# EAGLE board RasPi-BplusHAT (EAGLE 8.7.0)
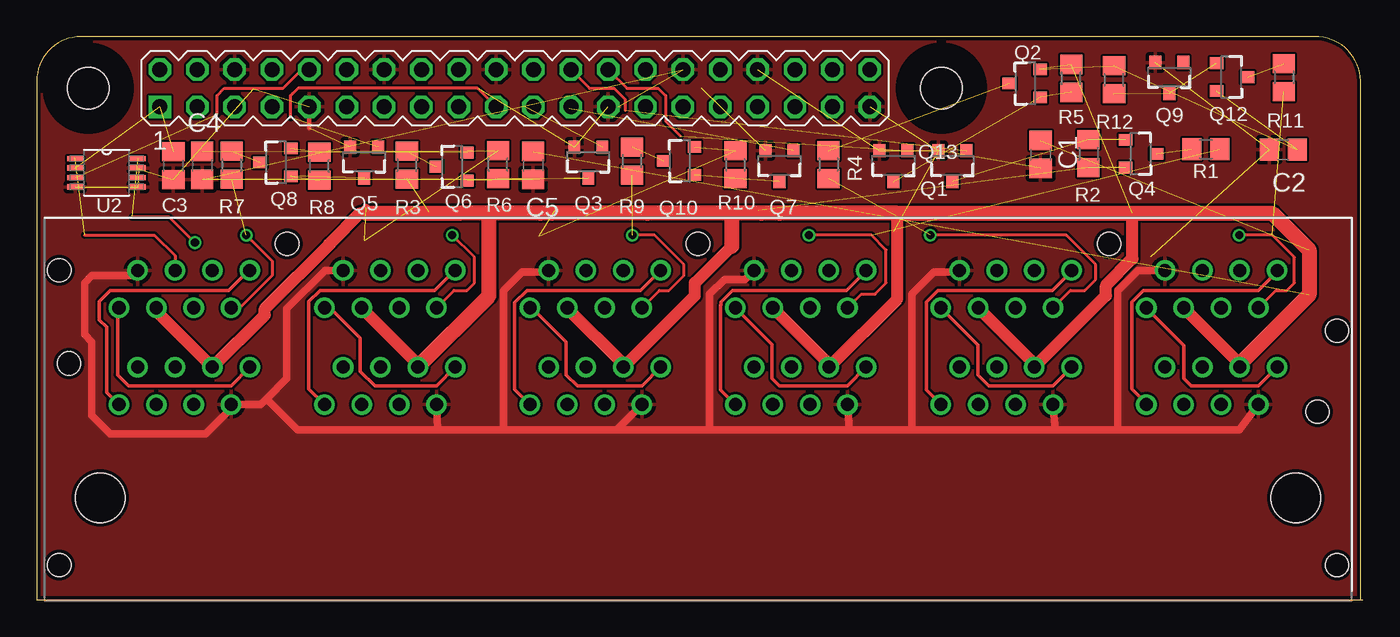
[diagram p0: board, top side]
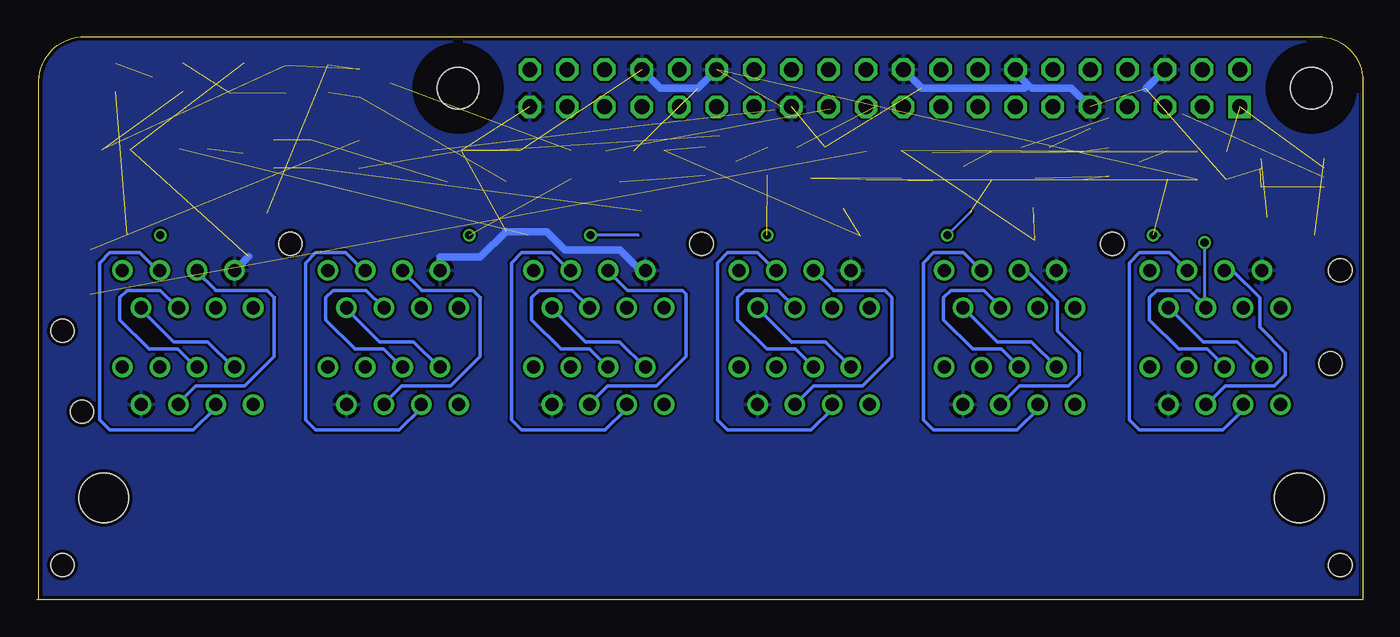
[diagram p1: board, bottom side, seen from below]

Size 90.15 x 38.3 mm. Coordinates in mm from the lower left corner, seen from the top.
Outline: 90,0 0,0 0,35.3 arc-90 3,38.3 86.89,38.3 arc-90 90,35.3 90,0
Outline: 90,0 90.15,0
Copper layers (1*16): Top 0.035mm / dielectric 1.5mm / Bottom 0.035mm
Design rules "ITEADstudio_DRC": minimum track width 6mil, minimum drill 12mil, track to track 6mil, track to pad 6mil, pad to pad 6mil, via to via 6mil, smd to smd 0mil, copper to edge 10mil, drill to drill 10mil, minimum pad ring 10mil, minimum via ring 6mil, stop-mask expansion 2mil, vias tented up to drill 100mil, thermal gap 10mil
Holes 2.8 mm at 3.5,34.8 61.5,34.8
tRestrict: area 1.9,33.3 to 5,36.4; area 60,33.3 to 63,36.4
bRestrict: area 1.9,33.3 to 5,36.4; area 60,33.3 to 63,36.4

## Footprints (pad centres in the part's own frame; a part is rotated, then mirrored left to right if it is on the bottom)
C0805 = smd 1.3 x 1.5: 1 -0.95,0; 2 0.95,0
PIN_20X2 = drill 1.016 square: 1 -24.13,-1.27 | drill 1.016 octagon: 2 -24.13,1.27; 3 -21.59,-1.27; 4 -21.59,1.27; 5 -19.05,-1.27; 6 -19.05,1.27; 7 -16.51,-1.27; 8 -16.51,1.27; 9 -13.97,-1.27; 10 -13.97,1.27; 11 -11.43,-1.27; 12 -11.43,1.27; 13 -8.89,-1.27; 14 -8.89,1.27; 15 -6.35,-1.27; 16 -6.35,1.27; 17 -3.81,-1.27; 18 -3.81,1.27; 19 -1.27,-1.27; 20 -1.27,1.27; 21 1.27,-1.27; 22 1.27,1.27; 23 3.81,-1.27; 24 3.81,1.27; 25 6.35,-1.27; 26 6.35,1.27; 27 8.89,-1.27; 28 8.89,1.27; 29 11.43,-1.27; 30 11.43,1.27; 31 13.97,-1.27; 32 13.97,1.27; 33 16.51,-1.27; 34 16.51,1.27; 35 19.05,-1.27; 36 19.05,1.27; 37 21.59,-1.27; 38 21.59,1.27; 39 24.13,-1.27; 40 24.13,1.27
SOT23-3 = smd 0.8 x 0.9: 1 -0.95,-1; 2 0.95,-1; 3 0,1.1
R0805 = smd 1.3 x 1.5: 1 -0.95,0; 2 0.95,0
SOP65P490X110-8N = smd 1.067 x 0.356: 1 -2.134,0.965; 2 -2.134,0.33; 3 -2.134,-0.33; 4 -2.134,-0.965; 5 2.134,-0.965; 6 2.134,-0.33; 7 2.134,0.33; 8 2.134,0.965
STEWARTSS73100 = drill 0.889: P$1 1.27,0; P$2 2.54,2.54; P$3 3.81,0; P$4 5.08,2.54; P$5 6.35,0; P$6 7.62,2.54; P$7 8.89,0; P$8 10.16,2.54; P$9 10.16,9.119; P$10 8.89,6.579; P$11 7.62,9.119; P$12 6.35,6.579; P$13 5.08,9.119; P$14 3.81,6.579; P$15 2.54,9.119; P$16 1.27,6.579; P$17 15.24,0; P$18 16.51,2.54; P$19 17.78,0; P$20 19.05,2.54; P$21 20.32,0; P$22 21.59,2.54; P$23 22.86,0; P$24 24.13,2.54; P$25 24.13,9.119; P$26 22.86,6.579; P$27 21.59,9.119; P$28 20.32,6.579; P$29 19.05,9.119; P$30 17.78,6.579; P$31 16.51,9.119; P$32 15.24,6.579; P$33 29.21,0; P$34 30.48,2.54; P$35 31.75,0; P$36 33.02,2.54; P$37 34.29,0; P$38 35.56,2.54; P$39 36.83,0; P$40 38.1,2.54; P$41 38.1,9.119; P$42 36.83,6.579; P$43 35.56,9.119; P$44 34.29,6.579; P$45 33.02,9.119; P$46 31.75,6.579; P$47 30.48,9.119; P$48 29.21,6.579; P$49 43.18,0; P$50 44.45,2.54; P$51 45.72,0; P$52 46.99,2.54; P$53 48.26,0; P$54 49.53,2.54; P$55 50.8,0; P$56 52.07,2.54; P$57 52.07,9.119; P$58 50.8,6.579; P$59 49.53,9.119; P$60 48.26,6.579; P$61 46.99,9.119; P$62 45.72,6.579; P$63 44.45,9.119; P$64 43.18,6.579; P$65 57.15,0; P$66 58.42,2.54; P$67 59.69,0; P$68 60.96,2.54; P$69 62.23,0; P$70 63.5,2.54; P$71 64.77,0; P$72 66.04,2.54; P$73 66.04,9.119; P$74 64.77,6.579; P$75 63.5,9.119; P$76 62.23,6.579; P$77 60.96,9.119; P$78 59.69,6.579; P$79 58.42,9.119; P$80 57.15,6.579; P$81 71.12,0; P$82 72.39,2.54; P$83 73.66,0; P$84 74.93,2.54; P$85 76.2,0; P$86 77.47,2.54; P$87 78.74,0; P$88 80.01,2.54; P$89 80.01,9.119; P$90 78.74,6.579; P$91 77.47,9.119; P$92 76.2,6.579; P$93 74.93,9.119; P$94 73.66,6.579; P$95 72.39,9.119; P$96 71.12,6.579 | hole 3.353: 0,-6.35; 81.28,-6.35 | hole 1.575: -2.134,2.794; -2.794,9.119; -2.794,-10.922; 84.074,-10.922; 82.753,-0.483; 84.074,5.029; 12.7,10.922; 40.64,10.922; 68.58,10.922

## Placement (x,y rotation side)
C1  [C0805]  68.25,30.3 270 top
C2  [C0805]  84.75,30.62 180 top
C3  [C0805]  9.29,29.54 270 top
C4  [C0805]  11.25,29.55 270 top
C5  [C0805]  33.75,29.55 270 top
K1  PIN20X2  [PIN_20X2]  32.5,34.8 0 top
Q1  220mA/50V/3.5Ω  [SOT23-3]  62.25,29.55 180 top
Q2  1.1A/60V/600mΩ  [SOT23-3]  67.21,35.13 90 top
Q3  220mA/50V/3.5Ω  [SOT23-3]  37.5,29.8 180 top
Q4  1.1A/60V/600mΩ  [SOT23-3]  75.03,30.34 270 top
Q5  220mA/50V/3.5Ω  [SOT23-3]  22.25,29.8 180 top
Q6  1.1A/60V/600mΩ  [SOT23-3]  28.26,29.47 90 top
Q7  220mA/50V/3.5Ω  [SOT23-3]  50.5,29.55 180 top
Q8  1.1A/60V/600mΩ  [SOT23-3]  16.27,29.77 90 top
Q9  220mA/50V/3.5Ω  [SOT23-3]  77,35.55 180 top
Q10  1.1A/60V/600mΩ  [SOT23-3]  43.72,29.86 90 top
Q12  1.1A/60V/600mΩ  [SOT23-3]  81.21,35.56 270 top
Q13  220mA/50V/3.5Ω  [SOT23-3]  58.25,29.55 180 top
R1  100  [R0805]  79.48,30.66 0 top
R2  1k  [R0805]  71.51,30.34 270 top
R3  100  [R0805]  25.16,29.56 270 top
R4  100  [R0805]  53.84,29.61 270 top
R5  1k  [R0805]  70.33,35.47 90 top
R6  1k  [R0805]  31.36,29.61 90 top
R7  100  [R0805]  13.25,29.56 270 top
R8  1k  [R0805]  19.21,29.51 90 top
R9  100  [R0805]  40.46,29.84 270 top
R10  1k  [R0805]  47.51,29.6 90 top
R11  100  [R0805]  84.79,35.53 270 top
R12  1k  [R0805]  73.25,35.37 90 top
U2  MAX481CUA+  [SOP65P490X110-8N]  4.75,29.05 0 top
U$1  STEWARTSS73100  [STEWARTSS73100]  4.32,13.29 0 top

## Library data of the parts
C1-C5 = rcl; SPICEPREFIX: C
K1 = FLYFISH
Q1 Q3 Q5 Q7 Q9 Q13 = SparkFun-DiscreteSemi; PROD_ID: TRANS-00830
Q2 Q4 Q6 Q8 Q10 Q12 = SparkFun-DiscreteSemi; PROD_ID: TRANS-08285
R1-R12 = resistor
U2 = MAX481CUA_; AVAILABILITY: Bad; DESCRIPTION: IC TXRX RS485/RS422 5V 8-UMAX; MF: Maxim Integrated; MP: MAX481CUA+; PACKAGE: MSOP-8 Maxim Integrated; PRICE: 1.77 USD
U$1 = Stewart_Connector_SS73100-046F

## Nets
485+: U2.8 U$1.P$4 U$1.P$12
485-: U2.1 U$1.P$5 U$1.P$13
+3V3: C3.1 K1.1 U2.2
+12V: C1.1 C2.1 C4.1 C5.1 Q2.2 Q4.2 Q6.2 Q8.2 Q10.2 Q12.2 R2.2 R5.2 R6.2 R8.2 R10.2 R12.2 U$1.P$6 U$1.P$14 U$1.P$22 U$1.P$30 U$1.P$38 U$1.P$46 U$1.P$54 U$1.P$62 U$1.P$70 U$1.P$78 U$1.P$86 U$1.P$94
GND: C1.2 C2.2 C3.2 C4.2 C5.2 K1.6 K1.9 K1.14 K1.20 K1.25 K1.30 K1.34 K1.39 Q1.2 Q3.2 Q5.2 Q7.2 Q9.2 Q13.2 U2.4 U2.5 U2.7 U$1.P$7 U$1.P$15 U$1.P$23 U$1.P$31 U$1.P$39 U$1.P$47 U$1.P$55 U$1.P$63 U$1.P$71 U$1.P$79 U$1.P$87 U$1.P$95
GPIO02: K1.3
GPIO6: Q9.1
GPIO06: K1.31
GPIO07: K1.26 Q13.1
GPIO08: K1.24 Q1.1
GPIO09: K1.21 Q3.1
GPIO10: K1.19 Q5.1
GPIO11: K1.23 Q7.1
GPIO12: K1.32
GPIO21: K1.40
N$1: Q1.3 Q4.1 R2.1
N$2: Q4.3 R1.1
N$3: Q3.3 Q6.1 R6.1
N$4: Q2.1 Q13.3 R5.1
N$5: Q2.3 R4.1
N$6: Q6.3 R3.1
N$7: Q5.3 Q8.1 R8.1
N$8: Q8.3 R7.1
N$9: Q7.3 Q10.1 R10.1
N$10: Q10.3 R9.1
N$11: Q9.3 Q12.1 R12.1
N$12: Q12.3 R11.1
N$13: U$1.P$1 U$1.P$9
N$15: U$1.P$3 U$1.P$11
N$17: U2.6
N$21: U$1.P$17 U$1.P$25
N$23: U$1.P$19 U$1.P$27
N$24: U$1.P$20 U$1.P$28
N$25: U$1.P$21 U$1.P$29
N$29: U$1.P$33 U$1.P$41
N$31: U$1.P$35 U$1.P$43
N$32: U$1.P$36 U$1.P$44
N$33: U$1.P$37 U$1.P$45
N$36: U$1.P$8 U$1.P$16
N$37: U$1.P$49 U$1.P$57
N$39: U$1.P$51 U$1.P$59
N$40: U$1.P$52 U$1.P$60
N$41: U$1.P$53 U$1.P$61
N$45: U$1.P$65 U$1.P$73
N$47: U$1.P$67 U$1.P$75
N$48: U$1.P$68 U$1.P$76
N$49: U$1.P$69 U$1.P$77
N$53: U$1.P$81 U$1.P$89
N$55: U$1.P$83 U$1.P$91
N$56: U$1.P$84 U$1.P$92
N$57: U$1.P$85 U$1.P$93
N$61: U$1.P$24 U$1.P$32
N$62: U$1.P$40 U$1.P$48
N$63: U$1.P$56 U$1.P$64
N$64: U$1.P$72 U$1.P$80
N$65: U$1.P$88 U$1.P$96
RXI: K1.10 U2.3
ZONE1: R7.2 U$1.P$2 U$1.P$10
ZONE2: R3.2 U$1.P$18 U$1.P$26
ZONE3: R9.2 U$1.P$34 U$1.P$42
ZONE4: R1.2 U$1.P$50 U$1.P$58
ZONE5: R4.2 U$1.P$66 U$1.P$74
ZONE6: R11.2 U$1.P$82 U$1.P$90

## Tracks (layer width: path | path; a pad name or v marks a point on that pad's centre or on a via)
485+  (via drill 0.55)  (1 unrouted)
  Top 0.203: v10.75,24.3 9,26.05 6.5,26.05
  Bottom 0.203: U$1.P$12 10.75,19.95 v10.75,24.3
  Bottom 0.254: 10.61,19.87 10.61,19.91 11.75,21.05 14,21.05 14.5,20.55 14.5,19.04 12.51,17.05 10.56,17.05 9.34,15.83
  Bottom 0.305: U$1.P$4 9.34,15.83 | U$1.P$12 10.61,19.87
485-  (2 unrouted)
  Top 0.203: 3.25,24.8 8,24.8 9.4,23.41 U$1.P$13
  Bottom 0.152: 10.61,13.46 10.61,13.29
  Bottom 0.254: 10.61,13.29 9.34,14.55 6,14.55 5.25,15.3 5.25,16.8 7,18.55 7,20.55 8.86,22.41 U$1.P$13
  Bottom 0.305: U$1.P$5 10.61,13.29
+3V3  (2 unrouted)
+12V  (18 unrouted)
  Top 0.305: 82.71,26.34 82.75,26.3 | 49.08,26.47 49.25,26.3 | 28.67,26.39 28.75,26.3 | 35.3,26.61 35,26.3 | 34.24,26.32 34.25,26.3 | 50.33,26.47 50.5,26.3
  Top 0.508: 41.46,26.34 41.5,26.3 | 19.75,24.3 20,24.3 | 22.39,26.7 22,26.3
  Top 0.813: U$1.P$14 8.13,19.64 U$1.P$6 15.5,19.39 15.5,19.8 20,24.3 22,26.3 22.41,26.3 | U$1.P$30 25.91,16.06 U$1.P$22 | U$1.P$46 39.88,16.06 U$1.P$38 44.75,20.7 44.75,21.55 47.25,24.05 | U$1.P$62 53.85,16.06 U$1.P$54 58.5,20.48 58.5,26.3 | U$1.P$78 67.82,16.06 U$1.P$70 72.69,20.7 72.69,21.39 74.5,23.2 74.5,26.3 | U$1.P$94 81.79,16.06 U$1.P$86
  Top 1.016: U$1.P$22 30.75,20.67 30.75,26.3 | 47.25,26.3 49.25,26.3 50.5,26.3 58.5,26.3 74.5,26.3 82.75,26.3 84,26.3 86.5,23.8 86.5,20.77 81.79,16.06 | 47.25,26.3 41.5,26.3 35,26.3 34.25,26.3 30.75,26.3 | 30.75,26.3 28.75,26.3 22.41,26.3 | 47.25,24.05 47.25,26.3
GND  (20 unrouted)
  Top 0.305: K1.9 18.53,32.07 | K1.25 39.52,33.53
  Top 0.508: U$1.P$15 6.5,22.05 3.75,22.05 3.25,21.55 3.25,18.05 3.75,17.55 3.75,12.55 5,11.3 11.5,11.3 13.21,13.01 U$1.P$7 15.24,13.29 15.62,13.68 | 15.62,13.68 17,15.05 17,19.8 19.61,22.41 U$1.P$31 | 15.62,13.68 17.75,11.55 27.25,11.55 | U$1.P$39 39.41,11.55 | 39.41,11.55 31.75,11.55 | 31.75,11.55 27.25,11.55 | U$1.P$23 27.25,11.55 | U$1.P$55 55.25,11.55 | 55.25,11.55 45.75,11.55 | 45.75,11.55 39.41,11.55 | U$1.P$87 81.75,11.55 73.5,11.55 | 73.5,11.55 69.25,11.55 | 69.25,11.55 59.5,11.55 | 59.5,11.55 55.25,11.55 | U$1.P$71 69.25,11.55 | U$1.P$47 34.69,22.3 33,22.3 31.75,21.05 31.75,11.55 | U$1.P$63 48.16,21.8 46.75,21.8 45.75,20.8 45.75,11.55 | U$1.P$79 62.63,22.3 61,22.3 59.5,20.8 59.5,11.55 | U$1.P$95 74.86,22.41 73.5,21.05 73.5,11.55
  Bottom 0.508: K1.6 14.75,34.77 | K1.34 47.75,34.8 45.2,34.8 K1.30 | 75.75,23.37 U$1.P$95 | U$1.P$79 62.74,23.3 60,23.3 58.25,25.05 55.5,25.05 54.25,23.8 50.5,23.8 49.1,22.41 U$1.P$63 | K1.9 19.8,34.8 22.5,34.8 22.75,35.05 | 22.75,35.05 23.61,35.91 K1.14 | K1.20 30,34.84 30,34.8 23,34.8 22.75,35.05
  pour Bottom: 0,0 90,0 90,35.3 arc90 86.89,38.3 3,38.3 arc90 0,34.8
  pour Top: 0,0.06 90,0 90,35.3 arc90 86.89,38.3 3,38.3 arc90 0,34.29
GPIO07  (1 unrouted)
  Top 0.203: K1.26 40.12,34.8 42.25,34.8 42.75,34.3 42.75,32.55 43.75,31.55
GPIO08  (1 unrouted)
  Top 0.203: 40,33.3 40,34.05 39.25,34.8 37.58,34.8 K1.24
GPIO09  (1 unrouted)
  Top 0.203: K1.21 33.18,33.53
GPIO10  (1 unrouted)
  Top 0.203: K1.19 29.96,34.8 17.76,34.8 17.4,34.44 17.38,34.44 17.25,34.3 17.25,32.8
GPIO11  (1 unrouted)
  Top 0.203: 36.2,33.42 K1.23
N$1  (2 unrouted)
N$2  (1 unrouted)
N$3  (2 unrouted)
N$4  (2 unrouted)
N$5  (1 unrouted)
N$6  (1 unrouted)
N$7  (2 unrouted)
N$8  (1 unrouted)
N$9  (2 unrouted)
N$10  (1 unrouted)
N$11  (2 unrouted)
N$12  (1 unrouted)
N$13
  Top 0.254: 14.42,22.41 13.06,21.05 5,21.05 4.25,20.3 4.25,19.05 4.75,18.55 4.75,14.13 U$1.P$1
  Top 0.305: U$1.P$9 14.42,22.41
N$15
  Bottom 0.152: U$1.P$11 11.88,22.41
  Bottom 0.254: U$1.P$11 13.15,23.62 15.18,23.62 15.88,22.92 15.88,12.23 15.2,11.55 9.5,11.55 8.07,12.99 8.07,13.29 U$1.P$3
  Bottom 0.305: U$1.P$11
N$21
  Top 0.254: 28.42,22.41 27.06,21.05 19.25,21.05 18.5,20.3 18.5,14.35 U$1.P$17
  Top 0.305: U$1.P$25 28.42,22.41
N$23
  Bottom 0.152: 25.93,22.41 25.88,22.41
  Bottom 0.254: 22.07,13.29 22.07,12.99 23.5,11.55 29.2,11.55 29.88,12.23 29.88,22.92 29.18,23.62 27.15,23.62 25.93,22.41 U$1.P$27
  Bottom 0.305: U$1.P$19 22.07,13.29
N$24
  Bottom 0.254: 24.61,19.87 24.61,19.91 25.75,21.05 28,21.05 28.5,20.55 28.5,19.04 26.51,17.05 24.56,17.05 23.34,15.83
  Bottom 0.305: U$1.P$20 23.34,15.83 | U$1.P$28 24.61,19.87
N$25
  Bottom 0.152: 24.61,13.46 24.61,13.29
  Bottom 0.254: 24.61,13.29 23.34,14.55 20,14.55 19.25,15.3 19.25,16.8 20.75,18.3 20.75,20.3 22.86,22.41 23.34,22.41
  Bottom 0.305: U$1.P$21 24.61,13.29 | U$1.P$29 23.34,22.41
N$29
  Top 0.254: U$1.P$41 41.06,21.05 33.33,21.05 32.5,20.22 32.5,14.32 U$1.P$33
N$31
  Bottom 0.152: 39.94,22.41 U$1.P$43
  Bottom 0.254: 39.94,22.41 41.15,23.62 43.18,23.62 43.88,22.92 43.88,12.23 43.2,11.55 37.5,11.55 36.07,12.99 U$1.P$35
N$32
  Bottom 0.254: U$1.P$44 38.61,19.91 39.75,21.05 42,21.05 42.5,20.55 42.5,19.04 40.51,17.05 38.56,17.05 U$1.P$36
N$33
  Bottom 0.152: 38.61,13.46 U$1.P$37
  Bottom 0.254: U$1.P$37 37.34,14.55 34,14.55 32,16.55 32,20.55 | 32,20.55 31.99,20.56 | U$1.P$45 36,21.07 | 36,21.07 36,21.05 | 32,20.55 32.5,21.05 35.98,21.05 36,21.07
N$36
  Top 0.254: U$1.P$16 5.5,19.78 5.5,15.3 6.25,14.55 13.2,14.55 U$1.P$8
N$37
  Top 0.254: 56.42,22.41 55.06,21.05 47.3,21.05 46.52,20.27 46.52,20.07 46.5,20.05 46.5,14.29 U$1.P$49
  Top 0.305: U$1.P$57 56.42,22.41
N$39
  Bottom 0.152: 53.94,22.41 53.88,22.41
  Bottom 0.254: 53.94,22.41 55.15,23.62 57.18,23.62 57.88,22.92 57.88,12.23 57.2,11.55 51.5,11.55 50.07,12.99 50.07,13.29
  Bottom 0.305: U$1.P$59 53.94,22.41 | U$1.P$51 50.07,13.29
N$40
  Bottom 0.254: 51.34,15.83 52.56,17.05 54.51,17.05 56.5,19.04 56.5,20.55 56,21.05 53.75,21.05 52.61,19.91 52.61,19.87 U$1.P$60
  Bottom 0.305: U$1.P$52 51.34,15.83
N$41
  Bottom 0.152: 52.61,13.46 52.61,13.29
  Bottom 0.254: 52.61,13.29 51.34,14.55 48,14.55 46,16.55 46,20.8 46.25,21.05 49.98,21.05 51.31,22.38 | 51.31,22.38 51.34,22.41 | U$1.P$61 51.31,22.38
  Bottom 0.305: U$1.P$53 52.61,13.29
N$45
  Top 0.254: 70.42,22.41 69.06,21.05 61.27,21.05 60.49,20.27 60.49,14.27 U$1.P$65
  Top 0.305: U$1.P$73 70.42,22.41
N$47
  Bottom 0.152: 67.88,22.41 67.94,22.41
  Bottom 0.254: 67.94,22.41 69.15,23.62 71.18,23.62 71.88,22.92 71.88,12.23 71.2,11.55 65.5,11.55 64.07,12.99 64.07,13.29
  Bottom 0.305: U$1.P$67 64.07,13.29 | U$1.P$75 67.88,22.41
N$48
  Bottom 0.254: 65.34,15.83 66.56,17.05 68.51,17.05 70.5,19.04 70.5,20.55 70,21.05 67.75,21.05 66.61,19.91 66.61,19.87 U$1.P$76
  Bottom 0.305: U$1.P$68 65.34,15.83
N$49
  Bottom 0.152: 66.61,13.46 66.61,13.29
  Bottom 0.254: 66.61,13.29 65.34,14.55 62,14.55 60,16.55 60,20.55 | 60,20.55 59.99,20.56 | 64,21.07 65.34,22.41 U$1.P$77 | 64,21.07 64,21.05 | 60,20.55 60.5,21.05 63.98,21.05 64,21.07
  Bottom 0.305: U$1.P$69 66.61,13.29
N$53
  Top 0.254: U$1.P$81 75.44,13.37 74.46,14.34 74.46,20.27 75.24,21.05 83.06,21.05 84.42,22.41 U$1.P$89
N$55
  Bottom 0.152: 81.94,22.41 81.88,22.41
  Bottom 0.254: 81.94,22.41 83.15,23.62 85.18,23.62 85.88,22.92 85.88,12.23 85.2,11.55 79.5,11.55 78.07,12.99 78.07,13.29 U$1.P$83
  Bottom 0.305: U$1.P$91 81.94,22.41
N$56
  Bottom 0.254: 80.61,19.87 80.61,19.91 81.75,21.05 84,21.05 84.5,20.55 84.5,19.04 82.51,17.05 80.56,17.05 79.34,15.83 U$1.P$84
  Bottom 0.305: U$1.P$92 80.61,19.87
N$57
  Bottom 0.152: 80.61,13.46 80.61,13.29
  Bottom 0.254: 80.61,13.29 79.34,14.55 76,14.55 74,16.55 74,20.55 | 74,20.55 73.99,20.56 | 78,21.07 79.34,22.41 U$1.P$93 | 78,21.07 78,21.05 | 74,20.55 74.5,21.05 77.98,21.05 78,21.07
  Bottom 0.305: U$1.P$85 80.61,13.29
N$61
  Top 0.254: U$1.P$24 27.17,14.55 23,14.55 22,15.55 22,17.8 19.93,19.87 U$1.P$32 19.5,19.81
N$62
  Top 0.254: U$1.P$40 41.14,14.55 36.75,14.55 36,15.3 36,17.55 33.69,19.87 U$1.P$48
N$63
  Top 0.254: U$1.P$56 55.11,14.55 50.5,14.55 50,15.05 50,17.37 U$1.P$64
N$64
  Top 0.254: 61.5,19.84 U$1.P$80 64,17.34 64,15.3 64.75,14.55 69.08,14.55 U$1.P$72
N$65
  Top 0.254: U$1.P$88 83.05,14.55 78.5,14.55 78,15.05 78,17.31 U$1.P$96
RXI  (1 unrouted)
  Top 0.203: 12.25,33.05 12.25,34.3 12.75,34.8 16.75,34.8 18.02,36.07 K1.10
ZONE1  (via drill 0.55)  (1 unrouted)
  Top 0.203: v14.25,24.8 16,23.05 16,22.05 13.75,19.8 13.27,19.8 U$1.P$10
  Bottom 0.203: 13.81,24.8 v14.25,24.8
  Bottom 0.254: 6.8,15.83 8.52,17.55 10.83,17.55 13.15,19.87
  Bottom 0.305: U$1.P$10 13.15,19.87 | U$1.P$2 6.8,15.83
ZONE2  (via drill 0.55)  (1 unrouted)
  Top 0.203: U$1.P$26 28.36,21.05 29.25,21.05 29.75,21.55 29.75,23.3 v28.25,24.8
  Bottom 0.203: v28.25,24.8 26.66,26.39
  Bottom 0.254: 20.8,15.83 22.52,17.55 24.83,17.55 27.15,19.87 U$1.P$26
  Bottom 0.305: U$1.P$18 20.8,15.83
ZONE3  (via drill 0.55)  (1 unrouted)
  Top 0.203: U$1.P$42 42.33,21.05 43,21.05 44,22.05 44,22.8 42,24.8 v40.5,24.8
  Bottom 0.254: U$1.P$34 36.52,17.55 38.83,17.55 U$1.P$42
ZONE4  (via drill 0.55)  (1 unrouted)
  Top 0.203: U$1.P$58 56.05,20.8 57,20.8 57.75,21.55 57.75,23.8 56.75,24.8 v52.5,24.8
  Bottom 0.203: 49.25,24.8 v52.5,24.8
  Bottom 0.254: 48.8,15.83 50.52,17.55 52.83,17.55 55.15,19.87 U$1.P$58
  Bottom 0.305: U$1.P$50 48.8,15.83
ZONE5  (via drill 0.55)  (1 unrouted)
  Top 0.203: U$1.P$74 70.27,21.05 71.25,21.05 72,21.8 72,22.8 70,24.8 v60.75,24.8
  Bottom 0.254: 69.15,19.87 66.83,17.55 64.52,17.55 62.8,15.83 U$1.P$66
  Bottom 0.305: U$1.P$74 69.15,19.87
ZONE6  (via drill 0.55)  (1 unrouted)
  Top 0.203: 83.25,20.06 84.24,21.05 85,21.05 85.5,21.55 85.5,23.3 84,24.8 v81.75,24.8
  Top 0.254: U$1.P$90 83.25,20.06
  Bottom 0.203: 81.77,24.83 v81.75,24.8
  Bottom 0.254: 76.8,15.83 78.52,17.55 80.83,17.55 83.15,19.87 U$1.P$90
  Bottom 0.305: U$1.P$82 76.8,15.83